# Altium PCB PCB_C70005-A2.PcbDoc (part 2 of 4)
Units mm, origin at the board's own origin, x right, y up, seen from the top; angles counter-clockwise.
Board outline 80.01 x 50.8 mm, 2 copper layers (Top Layer, Bottom Layer); 96 components, 63 nets, 254 pads, 376 vias.
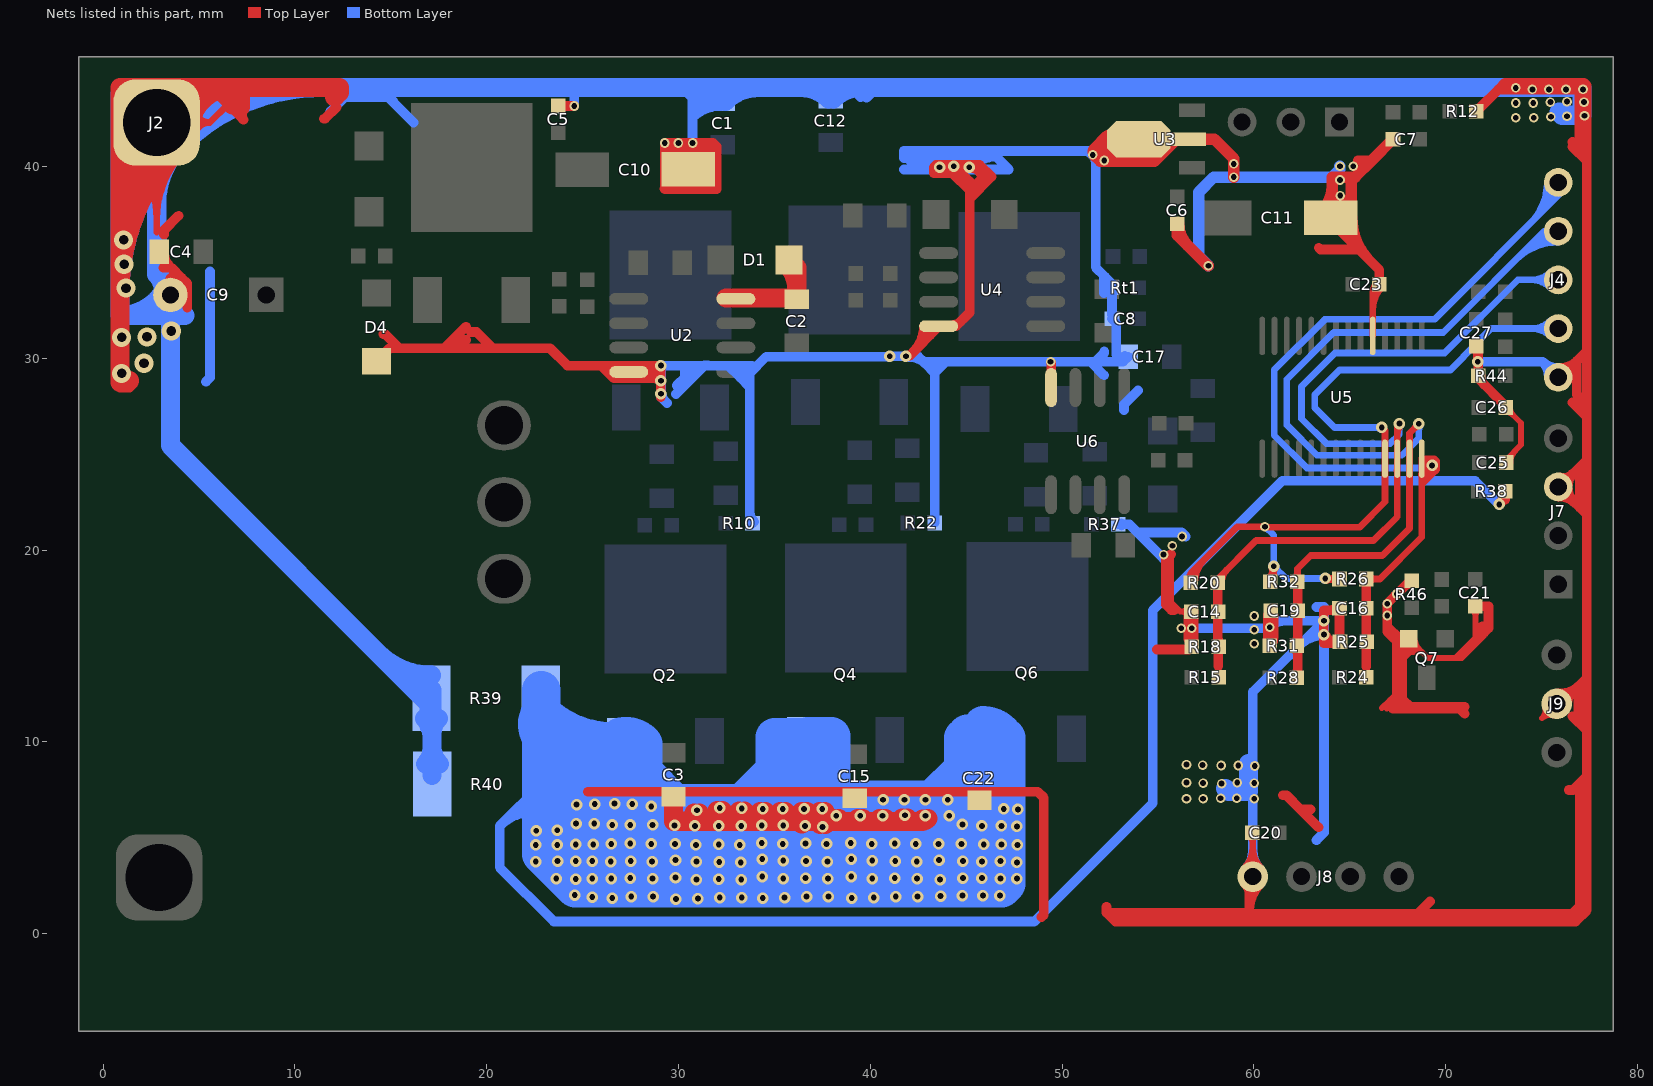
[diagram p2: the nets of this part, all layers, seen from the top]

## Via types
v1: diameter 0.6, hole 0.3, Top Layer to Bottom Layer, 247 vias
v2: diameter 1, hole 0.5, Top Layer to Bottom Layer, 69 vias
v3: diameter 0.5, hole 0.3, Top Layer to Bottom Layer, 60 vias

## Nets (pads, with @x,y where several pads share a name; then routed paths per layer and width w, separated by ;. In a path a pad name is that pad's centre, name@x,y a point inside that pad or via, vN(x,y) a via of type N, cw(c..) or ccw(c..) an arc to the next point about the centre after c; other vN are vias at no path point) (continued)
GND: C1.1 C4.2 C5.1 C6.1 C7.1 C8.1 C9.2 C10.1@30.512,39.852 C11.1@64.014,37.338 C12.1 C14.2 C16.2 C17.1 C19.2 C20.2 C21.1 C23.2 C25.1 C26.1 C27.1 D4.1 J2.1 J4.5 J7.3 J8.4 J9.2 Q7.2 R10.2 R12.1 R18.1 R22.2 R25.1 R31.1 R37.2 R39.1 R40.1 R44.1 R46.1 Rt1.1 U2.4 U3.2 U4.4 U5.5 U6.4 | length 937.9
  Top Layer w0.3: 55.708,19.806 55.677,19.776 55.677,17.272 56.159,16.789 56.591,16.789 C14.2@56.744,16.789 ; C14.2@56.58,16.626 ccw(c56.186,16.232) 56.186,16.789 ccw(c56.186,17.347) C14.2@56.58,16.953 ; 66.675,11.76 67.094,12.179 ; 66.929,11.725 66.929,11.773 67.335,12.179 ; 67.335,15.367 67.361,15.342 67.361,14.643 ; 67.412,11.725 67.412,11.963 67.627,12.179 ; 67.742,14.275 68.155,14.688 ; Q7.2@67.777,15.367 cw(c67.036,15.367) 67.56,14.843 ; 67.894,11.725 67.894,11.913 67.627,12.179 ; 68.386,11.725 68.281,11.831 67.742,12.37 67.361,12.751 ; Q7.2@68.392,15.367 ccw(c69.134,15.367) 68.609,14.843 ; C21.1@71.388,16.905 cw(c70.994,16.511) 71.552,16.511 cw(c72.109,16.511) C21.1@71.715,16.905 ; C21.1@71.552,17.069 71.552,15.443 70.485,14.376 ; 72.009,15.697 72.009,15.545 70.841,14.376 70.485,14.376 ; C26.1@73.127,27.201 cw(c73.127,26.643) 73.521,27.038 cw(c73.915,27.432) C26.1@73.358,27.432 ; C26.1@73.127,27.432 73.937,26.622 73.937,25.487 73.152,24.702 C25.1@73.152,24.562 ; C25.1@73.383,24.562 cw(c74.278,24.562) 73.645,25.195 ; J9.2@75.173,11.797 cw(c74.63,11.629) 75.032,11.227 ; J9.2@75.601,11.368 ccw(c75.433,10.825) 75.032,11.227 ; J9.2@75.794,11.989 75.032,11.227 ; 67.094,12.179 67.361,12.446 ; 67.094,12.179 67.335,12.179 ; 67.335,12.179 67.627,12.179 ; 67.361,12.446 67.361,12.751 ; 67.361,12.446 67.627,12.179 ; 67.361,12.751 67.361,14.643 ; 67.361,14.643 67.405,14.688 ; 67.405,14.688 67.742,14.688 68.155,14.688 ; 67.405,14.688 67.56,14.843 ; 67.56,14.843 cw(c68.085,14.318) 68.085,15.06 cw(c68.085,14.318) 68.609,14.843 ; 67.56,14.843 67.742,14.843 68.609,14.843 ; 67.56,14.843 67.742,15.024 Q7.2@68.085,15.367 68.609,14.843 ; 68.155,14.688 68.764,14.688 ; 68.609,14.843 68.764,14.688 ; 68.764,14.688 69.075,14.376 70.485,14.376
  Top Layer w0.35: J2.1@1.327,40.824 cw(c-2.215,37.282) 2.794,37.282 cw(c7.803,37.282) J2.1@4.261,40.824 ; J2.1@1.574,41.071 cw(c-1.371,38.126) 2.794,38.126 cw(c6.959,38.126) J2.1@4.014,41.071 ; J2.1@1.822,41.319 cw(c-0.526,38.971) 2.794,38.971 cw(c6.114,38.971) J2.1@3.766,41.319 ; J2.1@2.069,41.566 cw(c0.319,39.816) 2.794,39.816 cw(c5.269,39.816) J2.1@3.519,41.566 ; 2.794,36.576 J2.1@2.794,42.291 5.563,42.291 ; C9.2@3.683,33.608 3.75,33.541 C9.2@3.763,33.528 ; J2.1@4.45,41.807 cw(c5.096,41.618) 5.096,42.291 cw(c5.096,42.964) J2.1@4.45,42.775 ; J2.1@4.786,41.709 cw(c5.563,41.482) 5.563,42.291 ; J2.1@4.786,42.873 ccw(c5.563,43.1) 5.563,42.291 ; 7.163,43.891 6.764,43.493 6.756,43.485 6.51,43.239 5.563,42.291 ; J8.4@59.502,3.414 ccw(c58.435,4.481) 59.944,4.481 ccw(c61.453,4.481) J8.4@60.386,3.414 ; C20.2@59.773,5.112 cw(c59.36,4.699) 59.944,4.699 ; C20.2@59.919,5.258 59.944,5.232 J8.4@59.944,2.972 ; 59.944,4.822 cw(c60.355,4.822) C20.2@60.064,5.112 ; J8.4@60.02,2.972 J8.4@60.02,3.632 ; U5.5@66.198,31.166 66.198,33.508 C23.2@66.548,33.858 ; 66.198,32.515 cw(c67.891,32.515) C23.2@66.694,33.713 ; 66.198,33.36 cw(c67.046,33.36) C23.2@66.446,33.96
  Top Layer w0.5: 24.213,29.616 25.959,29.616 ; 26.385,29.47 ccw(c26.695,29.78) U2.4@26.695,29.341 ; U2.4@26.641,29.277 ccw(c26.238,29.207) 26.238,29.616 ; U2.4@26.692,29.341 cw(c26.629,30.287) 25.959,29.616 ; 26.832,29.616 cw(c26.832,29.31) U2.4@27.134,29.362 ; 27.426,29.616 cw(c27.426,29.412) U2.4@27.627,29.447 ; U2.4@27.759,29.022 ccw(c27.89,29.118) 27.89,28.956 ; U2.4@27.772,29.286 U2.4@27.407,29.286 26.568,29.286 26.238,29.616 ; 28.019,29.616 cw(c28.019,29.515) U2.4@28.12,29.532 ; U2.4@28.157,29.247 cw(c29.047,28.357) v1@29.047,29.616 ; U2.4@28.157,29.325 ccw(c28.434,29.602) 28.434,29.21 ; U2.4@28.162,29.319 ccw(c28.88,29.848) v1@28.88,28.956 ; U2.4@28.169,29.21 28.677,29.21 v1(29.083,29.616) ; 28.656,28.956 cw(c28.656,28.402) v1@29.048,28.794 ; v1@29.035,29.601 cw(c28.43,29.406) v1@28.88,28.956 ; v1@29.068,27.976 29.083,27.991 v1(29.083,28.829) 29.083,29.159 ; v1@43.383,40.03 43.307,39.954 43.307,39.649 44.272,39.649 45.187,38.735 ; v1@44.323,40.081 44.499,39.905 45.187,39.218 45.187,38.735 ; 45.187,36.246 45.187,38.33 45.187,38.735 ; v3@49.403,29.794 49.428,29.769 U6.4@49.428,28.473 ; 56.591,15.497 cw(c57.198,15.497) v3(56.769,15.926) ; 56.591,15.706 ccw(c57.515,15.706) R18.1@56.862,15.053 ; 56.591,16.105 cw(c57.428,16.105) C14.2@56.836,16.697 ; 56.591,16.355 ccw(c57.198,16.355) v3(56.769,15.926) ; C14.2@56.591,16.789 56.591,15.342 ; C14.2@56.651,16.697 cw(c56.121,16.167) 56.871,16.167 ; C14.2@56.744,16.789 56.871,16.789 56.871,15.621 ; 56.842,16.273 cw(c56.463,16.171) v3(56.769,15.926) ; 56.871,15.681 ccw(c56.524,15.681) v3(56.769,15.926) ; 56.871,16.171 cw(c56.524,16.171) v3(56.769,15.926) ; C11.1@64.383,36.773 65.483,35.673 66.548,34.608 C23.2@66.548,33.858 ; R25.1@64.44,15.469 64.465,15.494 C16.2@64.465,16.967 ; C11.1@64.664,37.338 ccw(c66.706,37.338) 65.262,35.894 ; C11.1@65.164,37.338 ccw(c68.413,37.338) 66.116,35.041 ; R46.1@67.868,18.111 cw(c68.224,17.755) R46.1@68.224,18.259 ; Q7.2@67.938,15.22 ccw(c67.584,14.867) 67.584,15.367 ccw(c67.584,15.867) Q7.2@67.938,15.514 ; Q7.2@68.085,15.367 67.615,15.367 ; R46.1@68.224,18.39 68.147,18.39 v3(66.954,17.197) 66.954,16.027 ; C27.1@71.51,30.54 cw(c71.041,30.071) v1@71.704,30.071 ; C21.1@71.552,17.069 72.238,17.069 ; C27.1@71.603,30.632 71.704,30.531 R44.1@71.704,29.083 71.704,28.932 73.127,27.51 C26.1@73.127,27.432 ; R12.1@71.603,42.875 R12.1@71.806,43.078 ; v1@71.635,29.845 ccw(c71.266,30.058) 71.678,30.168 ; R44.1@71.835,29.083 ccw(c72.516,29.083) 72.034,28.602 ; C26.1@72.848,27.788 cw(c72.492,27.432) C26.1@72.996,27.432 ; J7.3@75.87,23.292 75.968,23.292 J7.3@76.251,23.292 ; J4.5@75.87,28.804 J4.5@75.87,29.007 J4.5@75.993,29.007 ; J4.5@75.903,29.506 ccw(c75.985,30.72) 76.846,29.859 ; J4.5@76.328,28.808 cw(c76.632,28.676) 76.632,29.007 ; J4.5@76.328,29.206 ccw(c76.632,29.337) 76.632,29.007 ; J4.5@76.37,29.007 cw(c77.279,29.007) 76.636,29.649 ; 77.365,27.584 76.846,28.103 76.846,29.859 ; 77.365,30.378 76.846,29.859 ; 25.959,29.616 26.238,29.616 ; 25.959,29.616 26.619,28.956 28.103,28.956 v1@28.88,28.956 ; 26.238,29.616 v1(29.083,29.616) ; v1@28.88,28.956 29.083,29.159 ; 29.083,29.159 v1(29.083,29.616) ; 56.591,15.342 ccw(c56.132,15.8) v3(56.769,15.926) ; 56.591,15.342 56.871,15.621 ; 56.871,15.621 ccw(c57.159,15.333) 56.864,15.051 56.871,15.058 56.871,15.621 ; 66.954,16.027 67.615,15.367 ; 66.954,16.027 66.954,15.748 67.335,15.367 67.615,15.367 ; J4.5@75.993,29.007 76.846,29.859 ; J4.5@75.993,29.007 76.632,29.007
  Top Layer w0.508: 0.635,28.702 0.863,28.474 1.381,28.474 ; 3.15,34.722 3.565,34.722 4.094,34.193 ; 3.175,36.449 3.175,36.674 3.937,37.436 ; 3.632,34.29 3.509,34.167 C9.2@3.509,33.608 ; 4.393,32.639 4.393,33.894 4.094,34.193 ; 5.842,43.907 6.51,43.239 7.26,42.489 ; 6.756,44.119 6.756,43.501 6.764,43.493 7.163,43.094 ; 7.163,43.891 7.26,43.794 7.26,42.998 ; 7.315,42.434 7.26,42.489 ; 7.315,42.942 7.26,42.998 ; 11.506,42.494 11.573,42.494 12.166,43.088 ; D4.1@14.249,29.845 14.92,30.515 15.443,30.515 ; 14.605,31.267 14.691,31.267 15.443,30.515 ; 18.92,30.947 18.872,30.947 18.44,30.515 ; 18.92,31.648 17.787,30.515 ; 19.177,31.369 19.466,31.369 20.32,30.515 ; C5.1@23.8,43.155 v3(24.562,43.155) ; 24.213,29.616 23.314,30.515 20.32,30.515 ; U2.4@27.772,29.286 28.103,28.956 ; v3@29.282,41.224 ccw(c29.626,41.224) 29.383,40.981 ; C10.1@29.415,39.606 cw(c28.761,39.337) 29.261,38.837 ; C10.1@29.421,39.59 cw(c28.824,39.324) 29.286,38.862 ; C10.1@29.435,40.144 ccw(c28.716,40.508) v3@29.286,41.078 ; 29.64,40.767 ccw(c29.64,42.318) 30.737,41.221 cw(c30.314,41.644) 30.314,41.046 ; v3@29.994,41.222 ccw(c30.734,41.596) 30.734,40.767 ; v3@29.995,41.221 ccw(c30.417,41.644) 30.417,41.046 ; C10.1@30.313,40.467 ccw(c30.125,41.046) v3@30.734,41.046 ; 30.734,40.875 ccw(c31.535,40.875) C10.1@30.969,40.309 ; 31.154,41.046 cw(c31.154,41.644) 30.731,41.221 ccw(c31.828,42.318) 31.828,40.767 ; v1@42.012,30.099 U4.4@43.586,31.674 ; 42.242,30.33 ccw(c40.898,31.674) U4.4@42.799,31.674 ; 43.109,31.197 ccw(c42.632,31.674) U4.4@43.307,31.674 ; v1@43.383,40.03 43.434,40.081 44.323,40.081 45.706,40.081 46.322,39.465 45.187,38.33 ; U4.4@43.561,31.674 U4.4@43.586,31.674 ; U4.4@44.145,31.674 U4.4@43.586,31.674 ; U4.4@44.272,31.725 ccw(c44.272,32.338) 44.706,31.904 ; v1@44.381,39.972 cw(c44.643,39.71) 44.643,40.081 ; v1@44.381,40.038 ccw(c44.701,40.358) 44.701,39.905 ; v1@44.499,39.905 45.49,39.905 45.72,39.675 ; v1@44.986,39.905 ccw(c44.986,40.358) v1@45.306,40.038 ; v1@45.044,40.081 cw(c45.044,39.71) v1@45.306,39.972 ; 45.187,36.246 45.187,32.385 44.475,31.674 U4.4@43.586,31.674 ; 45.187,38.735 45.755,39.303 46.101,39.303 ; v1@45.339,39.959 cw(c45.339,38.779) 46.174,39.613 ; v1@45.372,39.972 cw(c45.634,39.71) 45.634,40.081 ; v3(51.6,40.602) 51.968,40.234 52.719,40.234 ; 52.324,1.397 52.324,1.092 ; 52.77,40.284 52.719,40.234 ; 54.954,14.814 56.622,14.814 R18.1@56.769,14.961 ; 55.677,19.776 55.408,19.507 55.408,17.159 55.702,16.866 55.855,16.866 ; U3.2@56.544,41.429 56.034,41.429 54.839,40.234 52.719,40.234 ; J8.4@59.558,2.586 cw(c59.055,2.083) 59.766,2.083 ; 59.766,1.224 cw(c61.691,1.224) J8.4@60.33,2.586 ; J8.4@59.944,2.972 59.766,2.794 59.766,1.041 ; 61.519,7.214 61.699,7.214 62.436,6.477 ; 61.849,1.041 61.541,1.041 ; 62.951,6.477 62.436,6.477 ; 63.373,5.54 62.436,6.477 ; 63.38,35.763 63.47,35.673 65.483,35.673 65.564,35.592 ; v1@63.694,15.615 ccw(c64.424,15.951) R25.1@64.424,15.148 ; 63.891,16.856 ccw(c63.891,17.542) C16.2@64.375,17.057 ; 64.023,15.148 ccw(c64.023,15.682) R25.1@64.401,15.304 ; C16.2@64.373,17.054 cw(c63.916,17.482) 63.916,16.856 63.643,16.856 63.643,15.148 R25.1@64.424,15.148 ; R25.1@64.491,15.215 R25.1@64.424,15.148 ; 65.42,40.312 66.144,40.312 66.294,40.462 ; 67.261,11.725 67.412,11.725 67.894,11.725 68.386,11.725 70.738,11.725 70.993,11.47 ; v3@67.347,17.596 v3(67.459,17.707) ; 67.742,12.37 67.742,14.275 67.742,14.688 67.742,14.843 Q7.2@67.742,15.024 ; 68.281,11.831 70.993,11.831 ; 69.19,1.676 68.555,1.041 ; 71.73,15.697 72.009,15.697 72.238,15.926 ; R12.1@71.806,43.078 72.746,44.018 ; 71.907,16.027 72.009,15.926 72.238,15.926 ; 72.243,16.712 72.243,17.063 72.238,17.069 72.238,15.926 ; 72.822,44.018 72.746,44.018 ; 75.131,44.365 cw(c75.131,43.711) 75.593,44.173 ; v3@75.232,44.018 ccw(c75.232,44.529) 75.593,44.168 ; 75.588,44.168 ccw(c75.949,44.529) 75.949,44.018 ; 75.588,44.173 cw(c76.05,43.711) 76.05,44.365 ; J9.2@75.794,11.989 76.019,11.989 76.922,12.892 ; J9.2@75.863,12.53 ccw(c76.024,13.79) 76.922,12.892 ; J7.3@75.87,22.796 cw(c75.87,21.49) 76.793,22.413 ; J7.3@75.968,23.292 76.649,23.973 ; J7.3@75.972,22.806 cw(c76.109,22.154) 76.581,22.625 ; J7.3@75.976,23.776 ccw(c76.133,24.489) 76.649,23.973 ; J9.2@76.34,11.989 cw(c77.114,11.989) 76.566,12.536 ; J7.3@76.363,23.24 ccw(c77.117,23.161) 76.581,22.625 ; 76.421,7.493 76.654,7.493 77.365,8.204 ; 76.619,11.33 77.365,10.584 ; 76.619,23.973 76.649,23.973 ; 76.619,27.69 77.365,26.944 ; 76.619,41.025 77.365,40.279 ; 76.619,41.275 77.365,40.529 ; 76.647,23.971 ccw(c77.326,23.292) 76.366,23.292 ccw(c77.455,23.292) 76.685,22.521 ; 76.987,7.671 76.987,1.422 76.606,1.041 68.555,1.041 ; 77.089,11.278 76.922,11.444 76.922,12.892 ; 77.089,23.546 76.997,23.454 ; C9.2@3.509,33.608 C9.2@3.509,33.299 3.75,33.541 C9.2@3.962,33.753 ; C9.2@3.509,33.608 C9.2@3.962,34.061 ; C9.2@3.962,33.753 C9.2@3.962,34.061 ; C9.2@3.962,33.753 4.094,33.884 4.094,34.193 ; C9.2@3.962,34.061 4.094,34.193 ; 7.163,43.094 7.26,42.997 ; 7.163,43.094 7.26,42.998 ; 7.26,42.489 7.26,42.997 ; 15.443,30.515 17.787,30.515 ; 17.787,30.515 18.44,30.515 ; 18.44,30.515 20.32,30.515 ; 29.261,38.837 29.286,38.811 31.979,38.811 31.979,40.767 ; 29.261,38.837 29.286,38.862 ; 29.286,38.862 v3@29.286,41.078 ; v3@29.286,41.078 v3(29.286,41.224) v3(29.997,41.224) v3(30.734,41.224) ; v3@29.286,41.078 29.607,40.757 ; 29.607,40.757 C10.1@30.512,39.852 30.734,40.074 30.734,40.767 ; 29.607,40.757 29.616,40.767 ; 29.616,40.767 30.734,40.767 ; 29.616,40.767 29.896,41.046 v3@30.734,41.046 ; 30.734,40.767 ccw(c31.287,40.767) 30.929,40.345 cw(c31.287,40.767) 30.734,40.767 ; 30.734,40.767 cw(c30.464,40.767) 30.478,40.497 ccw(c30.464,40.767) 30.734,40.767 ; 30.734,40.767 31.979,40.767 ; 30.734,40.767 v3@30.734,41.046 ; v3@30.734,41.046 v3(30.734,41.224) ; v3@30.734,41.046 31.979,41.046 ; v3(30.734,41.224) 31.801,41.224 31.979,41.046 ; 31.979,40.767 31.979,41.046 ; 52.324,1.092 52.781,0.635 60.173,0.635 ; 52.324,1.092 59.715,1.092 59.766,1.041 ; 59.766,1.041 61.541,1.041 ; 59.766,1.041 60.173,0.635 ; 60.173,0.635 76.784,0.635 77.365,1.216 77.365,8.204 ; 61.541,1.041 68.555,1.041 ; 72.746,44.018 76.886,44.018 76.962,43.942 76.962,41.348 77.365,40.945 ; 72.746,44.018 73.092,44.365 77.216,44.365 77.365,44.216 77.365,40.945 ; 76.581,22.625 76.997,22.209 ; 76.649,23.973 76.835,23.973 ; 76.649,23.973 77.365,24.689 ; 76.835,23.973 77.17,23.973 77.365,23.778 ; 76.835,23.973 76.997,23.811 76.997,23.454 ; 76.922,12.892 77.365,13.335 ; 76.997,22.209 77.365,21.841 ; 76.997,22.209 76.997,23.454 ; 77.365,8.204 77.365,10.584 ; 77.365,10.584 77.365,13.335 ; 77.365,13.335 77.365,21.841 ; 77.365,21.841 77.365,23.778 ; 77.365,23.778 77.365,24.689 ; 77.365,24.689 77.365,26.944 ; 77.365,26.944 77.365,27.584 77.365,30.378 77.365,40.279 ; 77.365,40.279 77.365,40.529 ; 77.365,40.529 77.365,40.945 ; C4.2@3.188,35.42 ccw(c3.964,35.42) 3.415,34.871 cw(c3.964,35.42) C4.2@3.188,35.42 ; 29.361,38.937 cw(c30.012,38.285) 30.012,39.206 ccw(c30.012,38.285) 29.361,38.937 ; v1@42,30.143 ccw(c41.896,30.529) 42.242,30.329 cw(c41.896,30.529) v1@42,30.143
  Top Layer w0.6: C6.1@56.007,37.008 56.007,36.424 v3@57.62,34.811 ; C6.1@56.088,37.008 ccw(c57.694,37.008) 56.558,35.872 ; U3.2@56.544,41.429 57.936,41.429 58.953,40.411 v3(58.953,39.446) ; C11.1@63.59,37.762 ccw(c62.397,38.955) 64.084,38.955 ; C11.1@64.014,37.338 C11.1@64.084,37.407 ; 64.084,38.618 ccw(c65.294,38.618) C11.1@64.439,37.762 ; C11.1@65.075,37.427 65.075,38.398 ; C7.1@67.259,41.427 66.144,40.312 65.278,39.446 ; C11.1@64.084,37.407 64.084,39.446 65.278,39.446 ; C11.1@64.084,37.407 65.075,38.398 ; 65.075,38.398 65.075,39.243 65.278,39.446
  Top Layer w0.8: R31.1@60.884,15.316 C19.2@60.884,16.586
  Top Layer w1: v2@0.881,33.448 cw(c11.637,33.448) J2.1@4.031,41.054 ; v2@0.881,35.862 cw(c9.223,35.862) J2.1@3.324,41.761 ; 0.881,38.276 cw(c6.809,38.276) J2.1@2.617,42.468 ; J2.1@0.881,40.69 cw(c4.395,40.69) J2.1@1.91,43.175 ; 1.381,28.829 1.305,28.753 0.881,28.753 J2.1@0.881,40.378 ; J2.1@2.545,42.316 cw(c4.541,42.112) J2.1@4.541,44.119 ; J2.1@2.794,42.291 J2.1@0.881,40.378 ; J2.1@3.54,42.215 cw(c5.649,41.999) 5.649,44.119 ; J2.1@4.535,42.113 cw(c6.756,41.886) 6.756,44.119 ; 6.756,43.205 6.756,43.485 6.756,43.501 ; 7.163,43.094 7.163,43.891 7.163,44.119 ; 12.065,43.619 12.319,43.873 12.319,44.119 7.163,44.119 ; U3.2@52.862,41.554 cw(c51.816,41.855) 51.816,40.767 ; U3.2@53.116,41.016 ccw(c52.649,39.934) 51.816,40.767 ; J2.1@0.881,40.378 0.881,44.119 6.756,44.119 ; 6.756,44.119 7.163,44.119 ; 51.816,40.767 52.478,41.429 U3.2@53.994,41.429 53.332,40.767 51.816,40.767
  Bottom Layer w0.3: R37.2@53.097,21.173 cw(c53.491,20.778) 53.491,21.336 cw(c53.491,21.894) R37.2@53.097,21.499
  Bottom Layer w0.35: J2.1@2.794,42.291 4.622,44.119 4.801,44.298
  Bottom Layer w0.5: v1@29.083,29.642 29.108,29.616 30.328,29.616 ; 29.921,28.575 29.921,28.6 30.328,29.007 ; 33.706,22.071 ccw(c34.542,22.071) R10.2@33.951,21.479 ; 33.833,29.595 33.577,29.339 ; 33.833,29.616 33.299,29.616 ; R10.2@33.858,21.387 33.706,21.539 33.706,28.495 ; 41.759,39.84 47.231,39.84 46.558,40.513 ; v1@42.014,30.049 cw(c42.072,28.915) 42.875,29.718 ; 42.215,40.513 42.494,40.792 46.279,40.792 ; 42.803,39.84 ccw(c42.803,40.611) v1@43.348,40.066 ; R22.2@43.358,21.412 43.358,29.235 ; v1@43.419,40.066 ccw(c43.964,40.611) 43.964,39.84 ; v1@43.829,39.84 ccw(c43.829,40.524) v1@44.313,40.04 ; 43.891,40.513 46.558,40.513 ; 43.967,29.82 43.942,29.82 ; 43.992,40.513 cw(c43.992,38.658) v1@45.304,39.97 ; v1@44.384,39.97 cw(c45.696,38.658) 45.696,40.513 ; v1@44.384,40.04 ccw(c44.868,40.524) 44.868,39.84 ; 44.82,39.84 ccw(c44.82,40.524) v1@45.304,40.04 ; v1@45.374,40.04 ccw(c45.858,40.524) 45.858,39.84 ; v1@45.377,39.972 cw(c46.558,38.952) 46.558,40.513 ; 51.158,40.792 cw(c51.158,40.185) 51.587,40.615 cw(c51.194,40.222) 51.75,40.222 ; 52.192,30.353 52.192,30.272 51.74,29.82 ; 52.197,29.108 51.486,29.82 ; Rt1.1@52.472,33.68 ccw(c51.669,33.68) 52.237,34.248 ; 52.512,29.82 ccw(c52.512,30.876) C17.1@53.259,30.129 ; C8.1@52.603,32.055 52.832,31.826 52.832,30.175 C17.1@53.188,29.82 ; C8.1@52.603,32.258 Rt1.1@52.603,33.68 52.603,33.882 52.237,34.248 ; R37.2@52.934,21.336 53.511,21.336 ; C17.1@53.442,30.074 C17.1@53.188,29.82 ; v3(56.769,15.926) 60.782,15.926 v3(60.833,15.977) ; J8.4@59.555,3.361 ccw(c58.616,4.3) 59.944,4.3 ccw(c61.272,4.3) J8.4@60.333,3.361 ; J8.4@59.944,2.972 59.944,12.598 v1(63.652,16.307) 61.163,16.307 v3(60.833,15.977) ; 61.63,16.307 ccw(c61.63,15.179) v3(60.833,15.977) ; 62.353,15.007 cw(c63.652,13.708) v1@63.652,15.546 ; v1(71.679,29.82) 75.057,29.82 ; J4.5@75.37,29.024 ccw(c74.3,29.062) 75.057,29.82 ; J4.5@75.852,29.506 cw(c75.814,30.577) 75.057,29.82 ; J4.5@75.87,29.007 75.057,29.82 ; 30.328,29.007 30.937,29.616 ; 30.328,29.007 30.328,29.616 ; 30.328,29.616 30.937,29.616 ; 30.937,29.616 31.35,29.616 32.584,29.616 ; 32.584,29.616 33.299,29.616 ; 32.584,29.616 33.219,28.981 ; 33.219,28.981 33.706,28.495 ; 33.219,28.981 33.577,29.339 ; 33.219,28.981 33.219,29.536 33.299,29.616 ; 33.299,29.616 33.577,29.339 ; 33.577,29.339 33.706,29.21 ; 33.706,28.495 33.706,29.21 ; 33.706,29.21 34.573,30.078 40.873,30.078 40.894,30.099 42.494,30.099 42.774,29.82 ; 42.774,29.82 42.977,29.82 ; 42.774,29.82 42.875,29.718 ; 42.875,29.718 43.358,29.235 ; 42.875,29.718 42.977,29.82 ; 42.977,29.82 43.942,29.82 ; 43.358,29.235 43.942,29.82 ; 43.942,29.82 51.486,29.82 ; 46.279,40.792 46.558,40.513 ; 46.279,40.792 51.359,40.792 51.75,40.401 51.75,34.735 52.237,34.248 ; 51.486,29.82 51.74,29.82 ; 51.74,29.82 C17.1@53.188,29.82
  Bottom Layer w0.508: 5.359,28.778 5.579,28.998 5.579,34.519 ; 11.862,42.875 12.598,43.612 13.08,43.612 ; 12.573,44.119 13.08,43.612 ; 15.113,43.416 14.917,43.612 14.859,43.612 ; 16.18,42.291 14.859,43.612 ; v3(24.562,43.155) 24.562,43.967 24.714,44.119 ; v1@29.083,29.642 v1(29.083,29.616) v1(29.083,28.829) 29.083,27.978 29.397,27.663 ; v1@29.129,28.143 ccw(c29.64,28.143) 29.279,27.782 ; v3(29.286,41.224) v3(29.997,41.224) v3(30.734,41.224) 30.734,42.545 ; 29.873,28.139 31.35,29.616 31.547,29.616 ; 30.175,44.119 30.734,43.56 30.734,43.028 ; 30.751,42.562 cw(c32.182,41.131) C1.1@32.182,43.155 ; 31.195,43.488 cw(c31.842,42.841) C1.1@32.312,43.627 ; 31.42,44.119 31.42,43.713 30.734,43.028 ; 31.618,43.429 cw(c32.182,42.865) C1.1@32.182,43.663 ; C1.1@31.996,43.235 ccw(c31.598,42.864) 31.598,43.409 ; C1.1@31.996,43.582 cw(c31.598,43.953) 31.598,43.409 ; C1.1@32.051,43.191 ccw(c31.497,42.264) 30.734,43.028 ; C1.1@32.309,43.409 31.598,43.409 ; 39.192,43.916 39.489,43.619 ; 39.805,43.581 40.343,44.119 40.716,44.119 ; 41.759,40.437 41.759,40.819 51.772,40.819 51.799,40.792 ; 51.359,40.792 51.799,40.792 ; 52.192,33.401 52.192,34.203 52.237,34.248 ; v3@52.197,40.395 51.799,40.792 ; 53.229,27.305 53.229,27.584 53.966,28.321 ; 53.511,21.336 53.934,20.914 ; v3@55.296,19.551 53.934,20.914 ; v3@56.45,20.706 56.242,20.914 53.934,20.914 ; 63.265,4.872 63.662,5.269 63.662,17.033 63.265,17.033 ; 13.08,43.612 14.859,43.612 ; 30.734,42.545 31.598,43.409 ; 30.734,42.545 30.734,43.028
  Bottom Layer w0.6: v3(57.633,34.823) 57.125,35.331 57.125,38.659 57.912,39.446 v3(58.953,39.446) 64.084,39.446 64.491,39.853 v3(64.491,40.005)
  Bottom Layer w1: v2@0.881,33.448 cw(c11.637,33.448) J2.1@4.031,41.054 ; v2@0.881,35.862 cw(c9.223,35.862) 3.324,41.761 cw(c9.018,36.067) 9.018,44.119 ; 0.881,38.276 cw(c6.809,38.276) 2.617,42.468 cw(c6.604,38.481) 6.604,44.119 ; J2.1@0.881,40.69 cw(c4.395,40.69) 1.91,43.175 cw(c4.189,40.896) J2.1@4.189,44.119 ; J2.1@1.557,41.054 cw(c-1.431,38.066) 2.794,38.066 cw(c7.019,38.066) J2.1@4.031,41.054 ; 2.673,32.233 ccw(c2.673,33.815) C9.2@4.02,32.984 ; 2.794,35.991 ccw(c6.201,35.991) C9.2@3.792,33.582 ; J2.1@2.794,42.291 2.794,34.37 ; C9.2@3.115,33.366 ccw(c1.981,33.557) 2.794,34.37 ; C9.2@3.169,33.509 cw(c0.881,34.92) 0.881,32.233 ; 4.267,32.233 3.509,32.233 ; 11.432,44.119 ccw(c11.432,33.653) J2.1@4.031,41.054 ; 14.334,14.622 ccw(c17.12,17.408) R39.1@17.12,13.468 ; 16.041,12.915 ccw(c17.12,13.994) R39.1@17.12,12.468 ; R39.1@16.766,11.215 cw(c15.851,10.3) 17.145,10.3 ; R40.1@16.817,8.851 ccw(c16.025,9.644) 17.145,9.644 ; R39.1@16.993,10.795 16.993,11.963 3.509,25.447 3.509,32.233 ; R40.1@17.145,8.255 R39.1@17.145,12.7 ; 17.145,9.766 ccw(c18.439,9.766) R40.1@17.524,8.851 ; 17.145,10.422 cw(c18.265,10.422) R39.1@17.473,11.215 ; 30.447,44.119 cw(c30.447,41.674) C1.1@32.176,43.403 ; C1.1@32.441,43.403 cw(c34.17,41.674) 34.17,44.119 ; 36.393,44.119 cw(c36.393,42.108) C12.1@37.815,43.53 ; C12.1@38.08,43.53 cw(c39.502,42.108) 39.502,44.119 ; 42.215,40.513 43.891,40.513 ; 42.701,40.513 cw(c42.701,39.348) v1@43.525,40.172 ; 43.213,40.136 cw(c43.891,39.715) 43.891,40.513 ; 43.605,40.513 cw(c43.605,39.261) v1@44.49,40.146 ; v1@44.534,40.08 ccw(c43.891,39.82) 43.891,40.513 ; 58.522,7.567 58.674,7.414 59.72,7.414 59.72,8.861 ; 75.921,42.824 76.073,42.672 77.119,42.672 77.119,44.119 40.343,44.119 31.42,44.119 ; 0.881,32.233 3.509,32.233 ; 0.881,32.233 0.881,43.79 1.21,44.119 4.622,44.119 12.573,44.119 24.714,44.119 30.175,44.119 31.42,44.119 ; 2.794,34.37 3.509,33.655 C9.2@3.509,33.299 3.509,32.233 ; C9.2@3.226,33.017 cw(c2.543,32.334) 3.509,32.334 ; C9.2@3.226,33.017 cw(c2.543,32.334) 3.509,32.334 ; C9.2@3.226,33.017 cw(c2.543,32.334) 3.509,32.334 ; C9.2@3.226,33.017 cw(c2.543,32.334) 3.509,32.334 ; C9.2@3.226,33.017 cw(c2.543,32.334) 3.509,32.334 ; 3.509,32.334 cw(c4.475,32.334) C9.2@3.792,33.017 ; 3.509,32.334 cw(c4.475,32.334) C9.2@3.792,33.017 ; 3.509,32.334 cw(c4.475,32.334) C9.2@3.792,33.017 ; 3.509,32.334 cw(c4.475,32.334) C9.2@3.792,33.017 ; 3.509,32.334 cw(c4.475,32.334) C9.2@3.792,33.017 ; 31.42,44.119 cw(c31.42,43.364) 32.174,43.408 ccw(c31.42,43.364) 31.42,44.119
  other v1: 63.652,15.596 29.083,28.143 41.021,30.099 41.859,30.099 43.612,39.954 45.161,39.954 44.348,40.005
  other v2: 0.965,29.21 2.134,29.743 0.965,31.09 2.286,31.115 3.556,31.42 1.194,33.655 1.092,34.9 1.067,36.17
  other v3: 56.49,7.036 57.353,7.036 60.02,7.036 58.268,7.061 59.106,7.061 58.318,7.823 57.353,7.849 60.02,7.849 56.49,7.874 59.131,7.874 60.046,8.738 58.293,8.763 59.182,8.763 57.328,8.788 56.49,8.814 60.02,15.113 60.02,15.85 56.21,15.926 60.02,16.561 66.954,16.586 55.296,19.761 55.753,20.218 56.261,20.706 49.403,29.82 64.503,38.481 64.491,39.294 65.185,40.005 58.953,40.132 52.197,40.31 73.66,42.545 74.6,42.545 75.489,42.596 76.327,42.621 77.241,42.647 73.66,43.307 74.574,43.307 75.463,43.358 77.216,43.358 76.327,43.383 74.524,44.018 75.387,44.018 76.276,44.018 77.165,44.018 73.66,44.094
HA: C19.1 J4.2 R28.2 R31.2 R32.2 U5.27 | length 54.8
  Top Layer w0.35: R32.2@62.11,18.484 ccw(c61.697,18.897) 62.281,18.897 ; R32.2@62.281,18.034 62.281,18.364 62.281,19.025 62.967,19.71 66.7,19.71 68.118,21.128 U5.27@68.118,24.766 68.118,26.091 v1(68.605,26.579) v1@68.605,26.67 ; 62.281,18.775 ccw(c62.691,18.775) R32.2@62.401,18.484 ; v1@68.48,26.579 cw(c68.179,26.579) 68.392,26.365 cw(c68.605,26.152) v1@68.605,26.454
  Top Layer w0.5: R28.2@62.137,13.428 ccw(c61.791,13.774) 62.281,13.774 ; R31.2@62.137,14.919 cw(c61.791,14.572) 62.281,14.572 ; R31.2@62.137,15.104 ccw(c61.791,15.45) 62.281,15.45 ; R28.2@62.281,13.487 62.281,15.316 C19.1@62.281,16.84 R32.2@62.281,18.034 ; R32.2@62.281,18.364 R32.2@62.401,18.484
  Bottom Layer w0.35: v1@68.517,26.49 cw(c68.304,26.277) 68.605,26.277 cw(c68.907,26.277) v1@68.694,26.49 ; v1(68.605,26.579) 68.605,25.832 67.716,24.943 63.297,24.943 61.722,26.518 61.722,28.905 64.16,31.344 69.875,31.344 75.159,36.627 J4.2@75.87,36.627 ; 73.674,35.142 cw(c75.87,32.947) J4.2@75.87,36.052 ; 74.272,35.74 cw(c75.87,34.142) J4.2@75.87,36.402 ; 74.869,36.337 cw(c75.87,35.337) J4.2@75.87,36.752
HB: C16.1 J4.1 R24.2 R25.2 R26.2 U5.28 | length 63.5
  Top Layer w0.35: R26.2@65.862,18.517 R26.2@65.862,18.491 66.573,18.491 68.758,20.676 68.758,23.419 ; R26.2@66.008,18.346 cw(c66.36,17.994) 66.36,18.491 cw(c66.36,18.989) R26.2@66.008,18.637 ; U5.28@68.739,23.932 cw(c69.063,23.649) 69.063,24.079 ; U5.28@68.74,23.898 ccw(c69.039,24.197) 69.039,23.774 ; U5.28@68.758,23.891 ccw(c68.758,24.172) 68.957,23.973 ; U5.28@68.768,24.789 cw(c68.578,24.37) v1@69.038,24.37 ; U5.28@68.776,24.748 ccw(c69.291,25.263) v1@69.291,24.534 ; U5.28@68.775,24.783 cw(c68.389,24.397) 68.936,24.397 ; 68.936,23.924 cw(c69.296,23.924) v1@69.292,24.284 ; 68.936,24.278 cw(c69.292,24.278) v1@69.289,24.634 ; 69.034,24.178 cw(c69.291,23.921) v1@69.291,24.284 ; 69.146,24.766 cw(c69.146,24.394) v1@69.515,24.432 ; v1@69.167,24.397 ccw(c68.758,24.355) U5.28@68.758,24.766 ; v1@69.167,24.392 cw(c68.801,24.341) 69.063,24.079 ; v1@69.184,24.345 cw(c68.783,24.105) 69.113,23.774 ; v1@69.197,24.492 ccw(c69.047,24.624) 69.189,24.766 ; v1(69.291,24.409) 69.266,24.409 v1@69.19,24.334 ; v1@69.291,24.663 69.189,24.766 ; v1@69.38,24.321 ccw(c69.593,24.108) 69.291,24.108 ccw(c68.989,24.108) v1@69.203,24.321 ; 68.758,23.419 69.113,23.774 ; 68.758,23.419 U5.28@68.758,23.774 ; U5.28@68.758,23.774 U5.28@68.758,24.079 ; U5.28@68.758,23.774 69.113,23.774 ; U5.28@68.758,24.079 U5.28@68.758,24.766 ; U5.28@68.758,24.079 68.936,24.079 ; U5.28@68.758,24.766 69.189,24.766 ; U5.28@68.758,24.766 v1@69.038,24.486 ; 68.936,24.079 ccw(c68.936,23.871) 68.734,23.922 cw(c68.936,23.871) 68.936,24.079 ; 68.936,24.079 69.063,24.079 ; 68.936,24.079 68.936,24.384 v1@69.038,24.486 ; 68.936,24.079 v1@69.19,24.334 ; v1@69.038,24.486 v1@69.19,24.334 ; 69.063,24.079 v1@69.291,24.308 ; 69.113,23.774 69.291,23.952 ; 69.189,24.766 69.392,24.766 69.52,24.638 69.52,24.181 69.291,23.952 ; v1@69.19,24.334 v1@69.203,24.321 ; v1@69.203,24.321 69.216,24.308 v1@69.291,24.308 ; 69.291,23.952 v1@69.291,24.308
  Top Layer w0.5: 65.862,13.919 C16.1@65.862,16.967 R26.2@65.862,18.491
  Bottom Layer w0.35: 68.683,24.282 ccw(c68.683,25.018) v1@69.203,24.498 ; v1(69.291,24.409) 69.164,24.282 62.763,24.282 61.062,25.984 61.062,29.388 63.703,32.029 69.418,32.029 75.87,38.481 J4.1@75.87,39.167 ; 74.403,37.014 ccw(c72.251,39.167) J4.1@75.295,39.167 ; 75.001,37.612 ccw(c73.446,39.167) J4.1@75.645,39.167 ; 75.598,38.209 ccw(c74.641,39.167) J4.1@75.995,39.167
HC: C14.1 J4.3 R15.2 R18.2 R20.2 U5.26 | length 48.2
  Top Layer w0.35: R20.2@58.102,18.479 60.122,20.498 66.243,20.498 67.478,21.732 U5.26@67.478,24.145 ; 58.115,13.97 58.141,13.945 58.191,13.894 ; R20.2@58.321,18.288 cw(c59.309,18.288) 58.611,18.987 ; U5.26@67.462,24.13 U5.26@67.478,24.145 ; 67.478,26.023 cw(c68.161,26.023) v1@67.678,26.505 ; v1(67.589,26.594) 67.478,26.482 U5.26@67.478,24.766 U5.26@67.478,24.145
  Top Layer w0.5: 58.115,15.342 R20.2@58.115,18.288 ; 58.115,15.4 ccw(c58.605,15.4) R18.2@58.259,15.053 ; 58.141,13.945 58.141,15.342
  Bottom Layer w0.35: v1@67.501,26.505 cw(c67.288,26.292) 67.589,26.292 cw(c67.891,26.292) v1@67.678,26.505 ; v1(67.589,26.594) 67.589,26.035 67.101,25.547 63.785,25.547 62.484,26.848 62.484,28.524 64.237,30.277 69.952,30.277 73.762,34.087 J4.3@75.87,34.087 ; J4.3@75.463,33.68 ccw(c74.482,32.699) 74.482,34.087 ccw(c74.482,35.475) J4.3@75.463,34.493
HS: J4.4 R20.1 R26.1 R32.1 U5.25 | length 52
  Top Layer w0.35: R20.1@56.573,18.434 ccw(c56.221,18.785) 56.718,18.785 ccw(c57.216,18.785) R20.1@56.864,18.434 ; R20.1@56.574,18.288 cw(c57.453,18.288) 56.832,18.909 ; R20.1@56.718,18.288 56.718,18.796 59.131,21.209 v3(60.579,21.209) 60.604,21.184 65.507,21.184 66.838,22.515 U5.25@66.838,24.766 66.838,26.228 v1(66.675,26.391) ; R20.1@56.924,18.288 cw(c58.648,18.288) 57.429,19.507 ; R32.1@60.728,18.498 ccw(c60.19,19.152) v1(61.036,19.152) 61.036,18.517 R32.1@60.858,18.339 ; v1@60.928,19.089 cw(c60.667,18.938) 60.958,18.86 cw(c61.25,18.782) v1@61.099,19.043 ; v1@60.948,19.063 cw(c60.734,18.85) 61.036,18.85 cw(c61.338,18.85) v1@61.125,19.063 ; v1(63.729,18.517) 63.754,18.491 R26.1@64.465,18.491 ; v1@63.791,18.408 cw(c64.006,18.036) R26.1@64.117,18.451 ; v1@63.817,18.605 ccw(c64.092,18.88) R26.1@64.092,18.491 ; v1@63.824,18.597 ccw(c64.009,18.753) 64.072,18.519 ; R26.1@64.32,18.346 ccw(c63.968,17.994) 63.968,18.491 ccw(c63.968,18.989) R26.1@64.32,18.637
  Bottom Layer w0.35: v3(60.579,21.209) 60.604,21.209 61.036,20.777 v1(61.036,19.152) 61.671,18.517 v1(63.729,18.517) ; v1@60.948,19.24 ccw(c60.734,19.453) 61.036,19.453 ccw(c61.338,19.453) v1@61.125,19.24 ; v1@61.036,19.027 cw(c61.036,18.725) 61.25,18.938 cw(c61.463,19.152) v1@61.161,19.152 ; v1@63.64,18.428 ccw(c63.427,18.215) 63.427,18.517 ccw(c63.427,18.818) v1@63.64,18.605 ; v1@66.587,26.302 ccw(c66.373,26.089) 66.373,26.391 ccw(c66.373,26.692) v1@66.587,26.479 ; v1(66.675,26.391) 64.211,26.391 63.17,27.432 63.17,28.092 64.465,29.388 70.256,29.388 70.95,30.081 70.95,30.122 72.375,31.547 J4.4@75.87,31.547 ; J4.4@75.463,31.14 ccw(c74.482,30.159) 74.482,31.547 ccw(c74.482,32.935) J4.4@75.463,31.953
NetC2_1: C2.1 D1.2 U2.8 | length 7.2
  Top Layer w1: U2.8@32.487,33.147 C2.1@35.941,33.147 ; D1.2@35.619,34.925 cw(c34.289,33.595) 36.17,33.595 ; D1.2@35.76,35.128 36.17,34.719 C2.1@36.17,33.071
NetC3_1: C3.2 C15.2 C22.2 Q2.3 Q4.3 Q6.3 R38.2 R39.2 R40.2 | length 374.4
  Top Layer w0.5: v1@72.768,22.418 ccw(c72.311,23.063) R38.2@73.101,23.063 R38.2@73.101,22.682 ; R38.2@72.974,23.03 cw(c72.314,22.86) v1(72.796,22.377) R38.2@73.101,22.682 ; 73.101,22.631 R38.2@73.101,22.682
  Top Layer w0.508: 25.273,7.391 48.739,7.391 49.047,7.083 49.047,0.976 48.935,0.864
  Top Layer w1: C3.2@29.743,7.137 29.743,5.842 42.596,5.842 v1@42.723,5.969 ; 30.035,5.842 ccw(c30.035,7.354) v1@31.104,6.285 ; v1@30.821,6.285 ccw(c31.89,7.354) 31.89,5.842 ; v1@30.922,5.842 ccw(c30.922,7.787) v1@32.298,6.412 ; v1@32.015,6.412 ccw(c33.391,7.787) v1@33.391,5.842 ; v1@32.127,5.842 ccw(c32.127,7.701) v1@33.441,6.386 ; v1@33.158,6.386 ccw(c34.472,7.701) v1@34.472,5.842 ; v1@33.28,5.842 ccw(c33.28,7.614) v1@34.533,6.361 ; v1@34.25,6.361 ccw(c35.503,7.614) v1@35.503,5.842 ; v1@34.321,5.842 ccw(c34.321,7.614) v1@35.574,6.361 ; v1@35.292,6.361 ccw(c36.545,7.614) v1@36.545,5.842 ; v1@35.439,5.842 ccw(c35.439,7.614) v1@36.692,6.361 ; 36.379,5.842 ccw(c36.379,7.614) v1@37.632,6.361 ; v1@36.409,6.361 ccw(c37.662,7.614) 37.662,5.842 ; 37.324,5.842 cw(c37.324,5.371) v1@37.657,5.704 ; v1@37.349,6.361 ccw(c38.602,7.614) 38.602,5.842 ; v1@37.374,5.704 cw(c37.707,5.371) 37.707,5.842 ; 37.974,5.842 ccw(c37.974,6.4) v1@38.368,6.005 ; v1@38.086,6.005 ccw(c38.48,6.4) 38.48,5.842 ; 39.219,5.842 ccw(c39.219,6.4) v1@39.613,6.005 ; v1@39.33,6.005 ccw(c39.725,6.4) 39.725,5.842 ; 40.387,5.842 ccw(c40.387,6.4) v1@40.781,6.005 ; v1@40.499,6.005 ccw(c40.893,6.4) 40.893,5.842 ; 41.494,5.842 ccw(c41.494,6.487) v1@41.95,6.031 ; v1@41.667,6.031 ccw(c42.123,6.487) 42.123,5.842 ; 42.622,5.842 ccw(c42.622,6.4) v1@43.017,6.005 ; v1@36.428,5.713 cw(c36.833,5.48) 36.712,5.931 ccw(c36.833,5.48) v1@36.428,5.713
  Bottom Layer w0.5: 20.676,5.613 20.676,5.603 ; 21.417,6.344 cw(c22.66,5.101) R40.2@22.844,6.849 ; R40.2@22.792,6.352 ccw(c22.518,3.76) 20.676,5.603 ; R40.2@22.87,7.798 22.845,7.772 20.676,5.603 ; v1@72.784,22.365 71.545,23.603 61.475,23.603 54.737,16.866 54.737,6.807 48.561,0.631 23.499,0.631 20.676,3.454 20.676,5.603
  Bottom Layer w0.508: Q6.3@45.489,9.649 45.489,10.414 Q6.3@45.489,10.516
  Bottom Layer w2: R39.2@22.845,12.7 22.845,10.185 ; 26.213,6.782 25.197,7.798 ; 26.364,8.595 cw(c28.011,8.595) Q2.3@26.846,9.76 ; Q2.3@26.526,10.033 cw(c26.526,15.275) 22.82,11.568 ccw(c23.877,10.913) 22.997,10.033 ; Q2.3@26.577,10.033 ccw(c26.577,4.792) 22.87,8.498 ccw(c21.988,9.329) 22.845,10.185 ; Q2.3@26.979,10.279 cw(c27.217,8.954) 28.169,9.906 ; Q2.3@27.085,10.275 cw(c26.729,8.88) 28.169,8.88 ; Q2.3@27.2,9.76 cw(c24.861,7.421) 28.169,7.421 ; 35.027,7.842 cw(c37.251,7.842) Q4.3@36.316,9.861 ; 36.017,8.054 ccw(c34.436,9.634) Q4.3@36.671,9.634 ; Q4.3@36.421,10.084 36.269,10.236 35.027,10.236 35.027,8.509 v1@33.325,6.807 ; Q4.3@36.578,9.828 cw(c34.216,6.907) 37.973,6.907 ; 44.856,8.198 cw(c46.951,8.198) Q6.3@45.752,9.915 ; 45.507,8.169 ccw(c43.966,9.71) Q6.3@46.145,9.71 ; Q6.3@45.767,10.374 cw(c46.324,9.444) 47.092,10.211 ; Q6.3@45.895,10.86 cw(c45.895,9.539) 46.829,10.473 ; Q6.3@46.072,9.887 cw(c43.61,7.425) 47.092,7.425 ; Q6.3@46.123,9.814 cw(c45.103,9.349) 45.895,8.557 ; v1@22.845,5.222 22.845,4.13 24.613,2.362 43.637,2.362 ; v1@22.845,5.222 22.845,7.772 R40.2@22.845,8.255 ; v1@22.845,5.222 23.749,4.318 ; R40.2@22.845,8.255 22.845,10.185 ; R40.2@22.845,8.255 25.245,8.255 Q2.3@26.364,9.374 ; 22.845,10.185 22.997,10.033 ; 22.997,10.033 Q2.3@27.023,10.033 ; 23.749,4.318 cw(c25.984,6.553) 22.87,7.098 ccw(c26.108,10.038) 26.108,5.664 ; 23.749,4.318 28.372,4.318 ; 24.105,5.664 26.109,5.664 ; 24.105,5.664 22.87,6.898 R40.2@22.87,7.798 25.197,7.798 ; 24.105,5.664 25.197,6.756 25.197,7.798 ; 26.109,5.664 26.364,5.92 Q2.3@26.364,9.374 ; Q2.3@26.364,9.374 Q2.3@27.023,10.033 ; Q2.3@27.023,10.033 28.042,10.033 28.169,9.906 ; 28.169,5.69 28.816,5.042 34.379,5.042 ; 28.169,5.69 28.169,4.521 28.372,4.318 ; 28.169,5.69 28.169,7.468 ; 28.169,7.468 28.169,8.433 ; 28.169,7.468 28.829,6.807 29.794,6.807 ; 28.169,8.433 28.169,9.906 ; 28.169,8.433 29.794,6.807 ; 28.372,4.318 33.655,4.318 ; 29.794,6.807 v1@33.325,6.807 ; v1@33.325,6.807 34.77,6.807 ; 33.655,4.318 37.084,4.318 ; 33.655,4.318 34.379,5.042 ; 34.379,5.042 35.024,5.687 35.024,6.378 37.084,4.318 ; 34.77,6.807 36.751,8.788 ; 34.77,6.807 35.888,6.807 36.751,7.671 ; 36.751,7.671 36.751,8.788 ; 36.751,7.671 36.751,6.429 37.973,5.207 ; 36.751,8.788 36.751,10.287 37.973,10.287 37.973,7.391 ; 37.084,4.318 37.973,5.207 ; 37.084,4.318 41.656,4.318 ; 37.973,5.207 38.075,5.105 42.443,5.105 ; 37.973,5.207 37.973,7.391 ; 37.973,7.391 38.379,6.985 v1(40.665,6.985) v1(41.783,6.985) v1(42.875,6.985) 43.231,6.985 ; 41.656,4.318 43.129,4.318 45.898,7.087 47.092,7.087 ; 41.656,4.318 42.443,5.105 ; 42.443,5.105 v1@44.323,6.985 ; 43.231,6.985 v1(44.044,6.985) v1@44.323,6.985 ; 43.231,6.985 44.856,8.611 44.856,10.211 45.06,10.414 45.489,10.414 Q6.3@45.872,10.414 ; 43.637,2.362 46.863,2.362 47.092,2.591 ; 43.637,2.362 45.199,3.924 ; v1@44.323,6.985 45.895,8.557 ; 45.199,3.924 46.533,2.591 47.092,2.591 ; 45.199,3.924 v1(45.923,4.648) 47.092,5.817 ; Q6.3@45.872,10.414 45.895,10.391 Q6.3@45.895,10.16 45.895,8.557 ; Q6.3@45.872,10.414 46.838,10.414 46.863,10.439 47.092,10.211 ; 47.092,2.591 47.092,5.817 ; 47.092,5.817 47.092,7.087 ; 47.092,7.087 47.092,10.211 ; Q2.3@27.156,9.794 cw(c26,7.96) 28.169,7.96 ccw(c26,7.96) Q2.3@27.156,9.794
  other v1: 29.87,1.803 31.013,1.829 26.543,1.854 34.392,1.854 39.04,1.854 32.156,1.88 33.299,1.88 35.535,1.88 40.183,1.88 25.502,1.905 27.534,1.93 28.677,1.93 36.678,1.93 37.821,1.93 41.326,1.93 42.469,1.93 43.663,1.956 44.806,1.981 45.872,1.981 46.761,1.981 24.587,2.007 30.937,2.819 33.274,2.819 43.637,2.819 24.638,2.845 32.106,2.845 23.622,2.87 25.502,2.87 26.492,2.87 28.651,2.87 35.458,2.87 37.795,2.87 40.107,2.87 42.443,2.87 46.787,2.87 47.65,2.87 27.483,2.896 36.627,2.896 41.275,2.896 44.831,2.896 45.822,2.896 29.845,2.921 34.366,2.972 39.014,2.972 33.249,3.708 47.65,3.708 32.131,3.734 22.555,3.759 26.467,3.759 28.626,3.759 30.937,3.759 37.77,3.759 42.418,3.759 45.822,3.759 23.698,3.785 24.638,3.785 25.502,3.785 27.508,3.785 36.652,3.785 41.3,3.785 44.831,3.785 46.787,3.785 35.458,3.81 40.107,3.81 29.845,3.835 43.586,3.835 34.366,3.886 39.014,3.886 22.555,4.623 23.673,4.623 30.912,4.623 33.198,4.623 47.676,4.623 24.638,4.648 25.552,4.648 32.106,4.648 46.838,4.648 26.492,4.674 28.575,4.674 29.82,4.674 35.433,4.674 37.719,4.674 40.081,4.674 42.367,4.674 43.561,4.674 44.755,4.674 27.483,4.699 36.627,4.699 41.275,4.699 34.341,4.724 38.989,4.724 22.581,5.359 23.673,5.385 37.516,5.563 47.65,5.588 30.861,5.613 32.106,5.613 33.274,5.613 36.601,5.613 45.822,5.613 46.838,5.613 29.794,5.639 34.341,5.639 35.458,5.639 26.543,5.664 27.483,5.664 28.651,5.664 44.806,5.69 24.663,5.74 25.603,5.74 38.227,6.147 39.472,6.147 40.64,6.147 42.875,6.147 44.12,6.147 41.808,6.172 30.963,6.426 47.701,6.477 34.392,6.502 35.433,6.502 36.551,6.502 37.49,6.502 46.965,6.502 33.299,6.528 32.156,6.553 28.575,6.629 24.689,6.731 25.629,6.756 27.584,6.756 26.67,6.782